# Altium PCB BT Mesh.PcbDoc
Units mil, origin at the board's own origin, x right, y up, seen from the top; angles counter-clockwise.
Board outline 3505 x 3005 mil, 2 copper layers (Top Layer, Bottom Layer); 90 components, 63 nets, 298 pads, 99 vias.
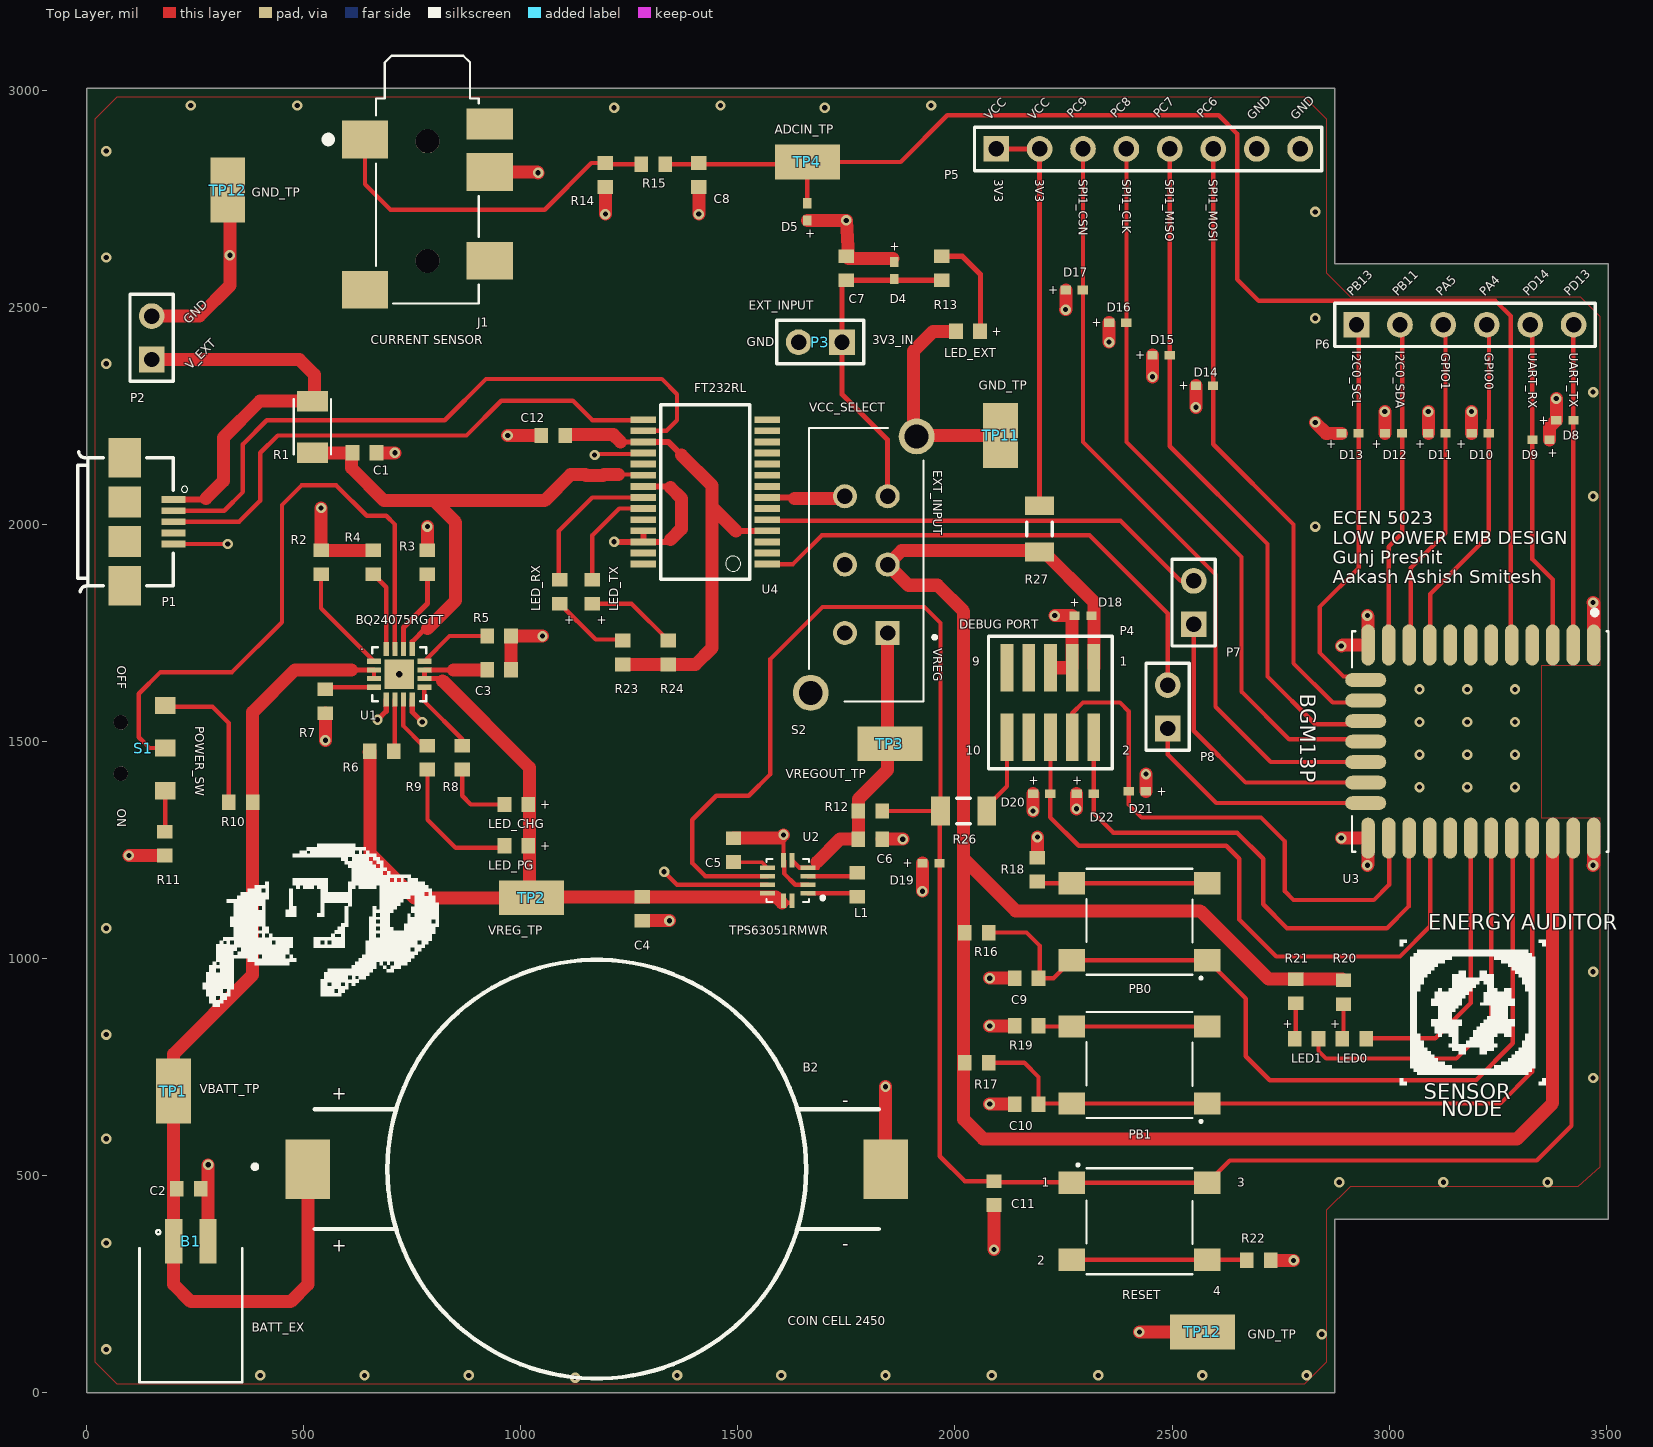
[diagram p0: Top Layer view]
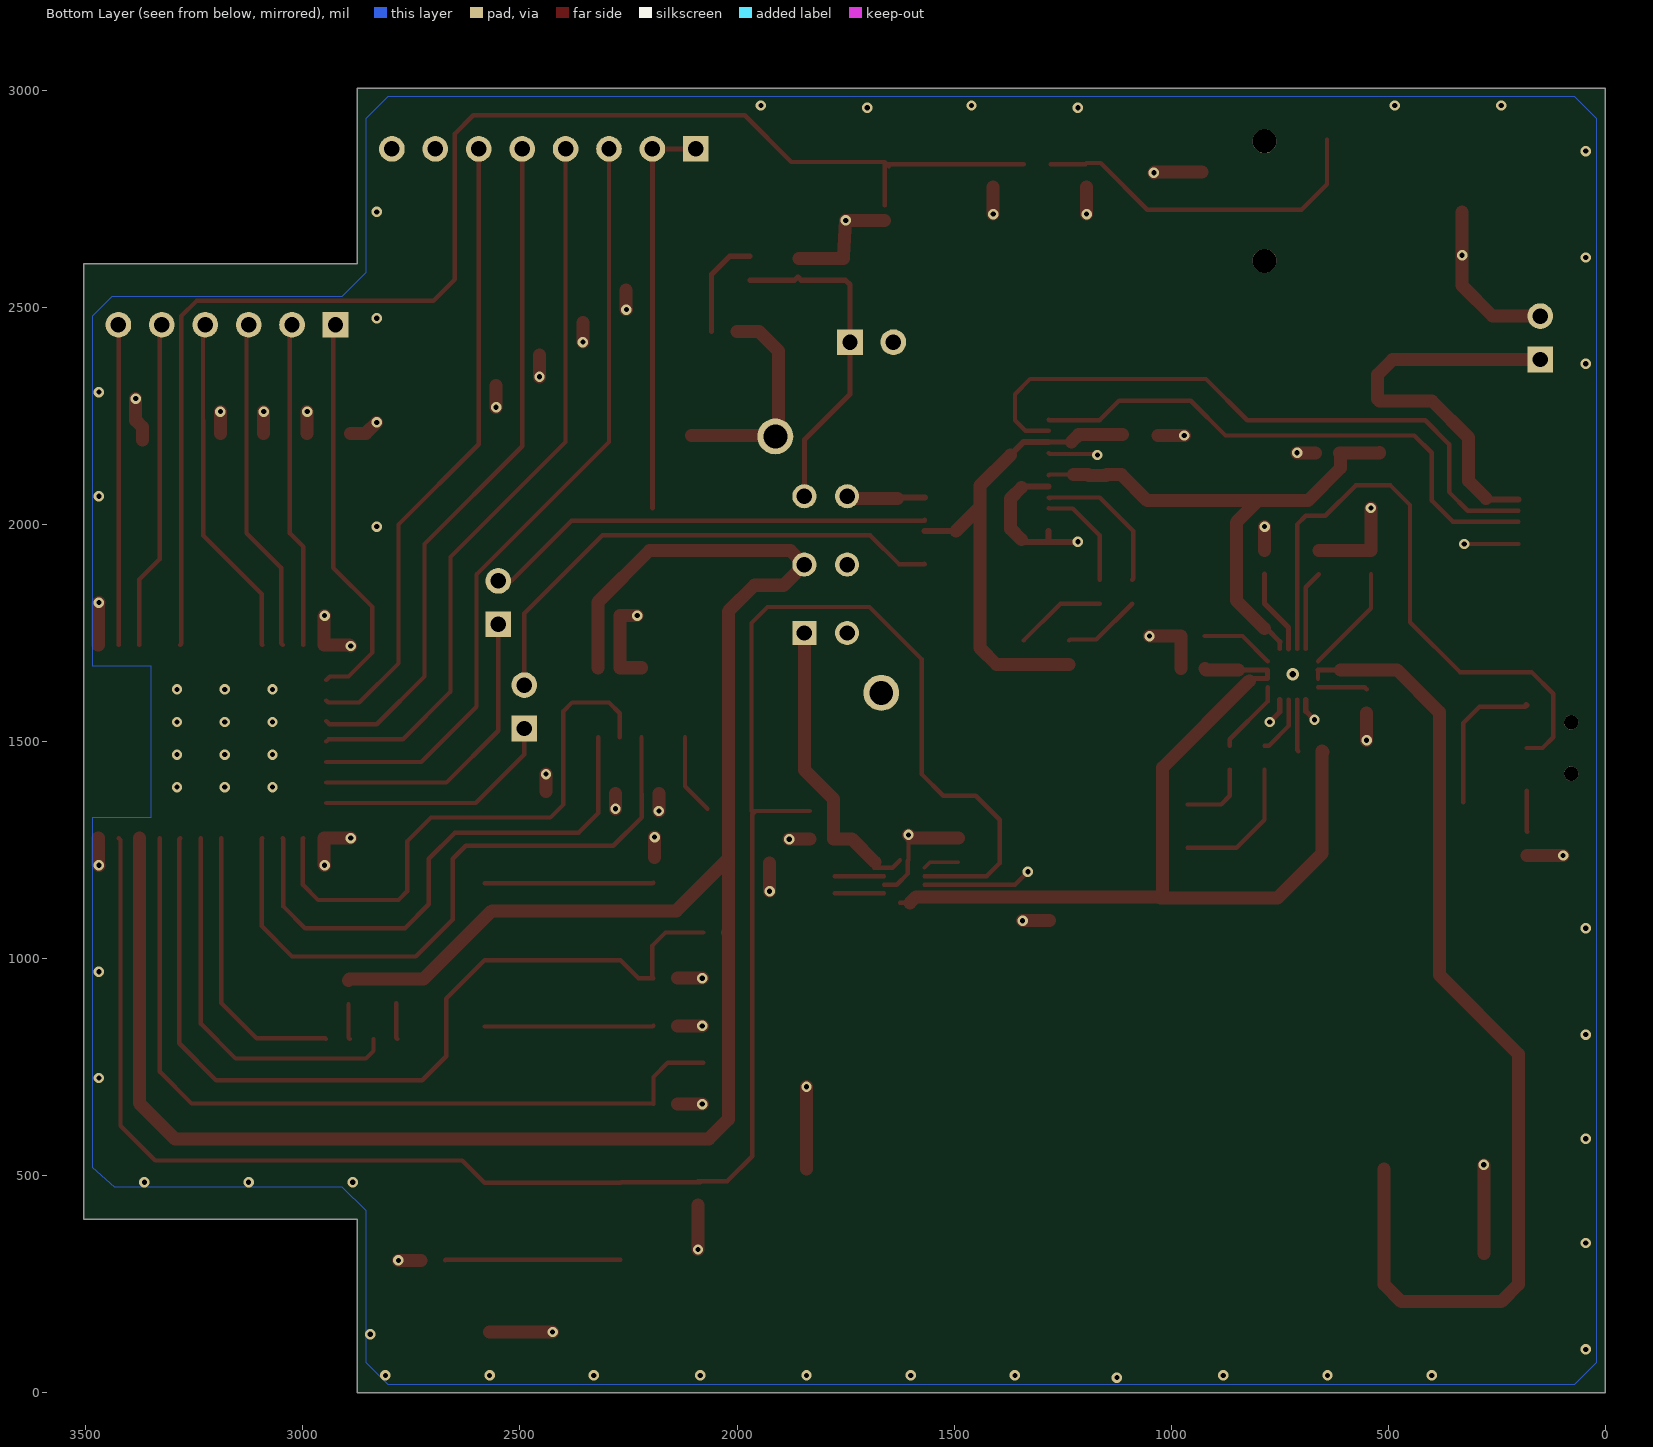
[diagram p1: Bottom Layer view, seen from below]

## Layer stack, top to bottom
Top Solder: solder mask 0.4, Solder Resist, Dk 3.5
Top Layer: signal copper 1.4
Dielectric 1: dielectric 12.6, FR-4, Dk 4.8
Bottom Layer: signal copper 1.4
Bottom Solder: solder mask 0.4, Solder Resist, Dk 3.5

## Board outline
2875,2600 3505,2600 3505,400 2875,400 2875,0 0,0 0,3005 2875,3005

## Design rules (kind name [scope] priority, off if disabled: settings)
Clearance [All] p1: gap=10 ignorepadtopadclearanceinfootprint=TRUE except(0: Arc-Hole Track-Hole SMDPad-Hole THPad-Hole Via-Hole Fill-Hole Poly-Hole Region-Hole Text-Hole; 8: Arc-SMDPad Track-Track Track-SMDPad SMDPad-SMDPad; 20: Arc-Via Track-Via SMDPad-Via THPad-Via Via-Via; 25: Arc-Poly Track-Poly SMDPad-Poly THPad-Poly Via-Poly Fill-Poly Poly-Poly)
PolygonConnect [All] p1: connectstyle=Relief reliefconductorwidth=10 reliefentries=4 polygonreliefangle="90 Angle" airgapwidth=10
RoutingVias [All] p1: holewidth=12 width=24 viastyle="Through Hole" minholewidth=10 minwidth=20 maxholewidth=14 maxwidth=28
SolderMaskExpansion [All] p1: expansion=4
Width Width_Power [(InNet('V_USB') OR InNet('V_RAW') OR InNet('V_BATT') OR InNet('VREGOUT') OR InNet('VREG') OR InNet('VCC_IO') OR InNet('VCC') OR InNet('GND'))] p1: maxlimit=30 minlimit=10 preferedwidth=20
Width [All] p2: maxlimit=12 minlimit=8 preferedwidth=10
30 further rules are at their usual default settings.

## Classes and differential pairs
component class USB: C12 LED_RX LED_TX R23 R24 U4
component class Regulator: C4 C5 C6 C7 D4 L1 LED_EXT P3 R12 R13 S2 TP3 TP12 U2
component class PMIC: B1 B2 C1 C2 C3 LED_CHG LED_PG P1 P2 R1 R2 R3 R4 R5 R6 R7 R8 R9 R10 R11 S1 TP1 TP2 U1
component class Gecko: C8 D5 J1 P7 P8 R14 R15 TP4 TP11 TP12 U3
component class "Gecko IO": C9 C10 C11 D8 D9 D10 D11 D12 D13 D14 D15 D16 D17 D18 D19 D20 D21 D22 LED0 LED1 P4 P5 P6 PB0 PB1 R16 R17 R18 R19 R20 R21 R22 R26 R27 RESET

## Components (designator, comment, footprint, x,y, rotation, side; value= is the part's Value field where it differs from the comment)
B1 "BATT_EX" S2B-PH-SM4-TB(LF)(SN) 240,270 r90 top
B2 "SMTU2450N-LF_BULK" SMTU2430-LF 1175,515 r0 top
C1 "1uF" 1608[0603] 640,2165 r180 top
C2 "10uF" 1608[0603] 235,470 r180 top
C3 "1uF" 1608[0603] 950,1665 r180 top
C4 "10uF" 1608[0603] 1280,1115 r90 top
C5 "1.3nF" 1608[0603] 1490,1250 r270 top
C6 "10uF" 1608[0603] 1805,1275 r180 top
C7 "1uF" 1608[0603] 1750,2590 r270 top
C8 "1uF" 1608[0603] 1410,2805 r90 top
C9 "1nF" 1608[0603] 2165,955 r0 top
C10 "1nF" 1608[0603] 2165,665 r0 top
C11 "100nF" 1608[0603] 2090,460 r270 top
C12 "100nF" 1608[0603] 1075,2205 r180 top
D4 "D Zener" 0402 1860,2585 r270 top
D5 "D Zener" 0402 1660,2720 r90 top
D8 "D Zener" 0402 3405,2240 r0 top
D9 "D Zener" 0402 3350,2195 r180 top
D10 "D Zener" 0402 3210,2210 r0 top
D11 "D Zener" 0402 3110,2210 r0 top
D12 "D Zener" 0402 3010,2210 r0 top
D13 "D Zener" 0402 2910,2210 r0 top
D14 "D Zener" 0402 2575,2320 r0 top
D15 "D Zener" 0402 2475,2390 r0 top
D16 "D Zener" 0402 2375,2465 r0 top
D17 "D Zener" 0402 2275,2540 r0 top
D18 "D Zener" 0402 2295,1790 r0 top
D19 "D Zener" 0402 1945,1220 r0 top
D20 "D Zener" 0402 2200,1380 r0 top
D21 "D Zener" 0402 2420,1385 r180 top
D22 "D Zener" 0402 2300,1380 r0 top
J1 "SJ2-35043C-SMT-TR" CUI_SJ2-35043C-SMT-TR 785,2745 r270 top
L1 "1.5uH" 1608[0603] 1775,1170 r270 top
LED0 "LED0" 1608[0603] 2920,815 r0 top (schematic designator D6)
LED1 "LED1" 1608[0603] 2810,815 r0 top (schematic designator D7)
LED_CHG "LED_CHG" 1608[0603] 990,1355 r180 top (schematic designator D1)
LED_EXT "LED_EXT" 1608[0603] 2030,2445 r180 top (schematic designator D3)
LED_PG "LED_PG" 1608[0603] 990,1260 r180 top (schematic designator D2)
LED_RX "LED_RX" 1608[0603] 1090,1845 r90 top (schematic designator D23)
LED_TX "LED_TX" 1608[0603] 1165,1845 r90 top (schematic designator D24)
P1 "10104111-0001LF" FRAMATOME_10104111-0001LF 87.8,2006.18 r270 top
P2 "Header 2" HDR1X2 150,2380 r90 top
P3 "EXT_INPUT" HDR1X2 1740,2420 r180 top
P4 "SAMTEC-FTSH-105-01-X-DV" SAMTEC-FTSH-105-01-X-DV 2220,1590 r180 top
P5 "Header 8" HDR1X8 2095,2865 r0 top
P6 "Header 6" HDR1X6 2925,2460 r0 top
P7 "Header 2" HDR1X2 2550,1770 r90 top
P8 "Header 2" HDR1X2 2490,1530 r90 top
PB0 "PB0" 430182043816 2425,1085 r180 top (schematic designator S3)
PB1 "PB1" 430182043816 2425,755 r180 top (schematic designator S4)
R1 "PTC FUSE" RESC3216X125N 520,2225 r270 top
R2 "10K" 1608[0603] 540,1913 r270 top
R3 "0R" 1608[0603] 785,1913 r270 top
R4 "8.9K" 1608[0603] 660,1913 r270 top
R5 "3.3K" 1608[0603] 950,1743 r180 top
R6 "10K" 1608[0603] 680,1478 r0 top
R7 "100K" 1608[0603] 550,1593 r270 top
R8 "1K" 1608[0603] 865,1463 r270 top
R9 "3.3K" 1608[0603] 785,1463 r270 top
R10 "100K" 1608[0603] 355,1360 r180 top
R11 "0R" 1608[0603] 180,1265 r90 top
R12 "100K" 1608[0603] 1805,1340 r180 top
R13 "3.3K" 1608[0603] 1970,2590 r270 top
R14 "330" 1608[0603] 1195,2805 r90 top value=330R
R15 "1.6K" 1608[0603] 1305,2830 r180 top
R16 "1M" 1608[0603] 2050,1060 r180 top
R17 "1M" 1608[0603] 2050,760 r180 top
R18 "100R" 1608[0603] 2190,1205 r270 top
R19 "100R" 1608[0603] 2165,845 r0 top
R20 "3.3K" 1608[0603] 2895,922.44 r90 top
R21 "3.3K" 1608[0603] 2785,925 r90 top
R22 "100R" 1608[0603] 2700,305 r180 top
R23 "1K" 1608[0603] 1235,1705 r270 top
R24 "1K" 1608[0603] 1340,1705 r270 top
R26 "0R" C1206 2020,1340 r180 top
R27 "0R" C1206 2195,1990 r270 top
RESET "RESET" 430182043816 2425,395 r0 top (schematic designator S5)
S1 "POWER_SW" SW_AYZ0102AGRLC 130,1485 r270 top
S2 "1825289-1" SW_1825289-1_1825289-1(Primary) 1795.79,1907.52 r90 top
TP1 "VBATT_TP" TP380X203 200,695 r90 top
TP2 "VREG_TP" TP380X203 1025,1140 r0 top
TP3 "VREGOUT_TP" TP380X203 1850,1495 r0 top
TP4 "ADCIN_TP" TP380X203 1660,2835 r0 top
TP11 "GND_TP" TP380X203 2105,2205 r270 top
TP12 "GND_TP" TP380X203 325,2770 r270 top
TP12 "GND_TP" TP380X203 2570,140 r180 top (schematic designator TP10)
U1 "BQ24075RGTT" QFN50P300X300X100-17N 720,1655 r0 top
U2 "TPS63051RMWR" QFN50P250X250X100-12N 1615,1180 r180 top
U3 "BGM13P22F512GA-V2" MODULE_BGM13P22F512GA-V2 3210,1500 r270 top
U4 "FT232RL" SOP65P780X200-28N 1425,2075 r180 top

## Footprints (in the part's own frame and the unit in brackets; to place one, negate y for a bottom-side part, rotate by r counter-clockwise, add the part's x,y. Pads: shape width x height; smd on the part's side, far side on the other; paste and mask are expansions set on the pad)
0402 [mm] "Chip Capacitor, Body 1.0x0.5mm, IPC High Density"
  rect 0.6x0.5 smd: 1(-0.5,0) 2(0.5,0)
  body extent -0.55,-0.3 0.55,0.3, height 1.3
1608[0603] [mm] "Chip Capacitor, Body 1.6x0.8mm, IPC High Density"
  rect 0.8x0.9 smd: 1(-0.7,0) 2(0.7,0)
  body extent -0.87,-0.48 0.87,0.48, height 1.3
430182043816 [mm]
  rect 1.55x1.3 smd: 1(-3.975,2.25) 2(-3.975,-2.25) 3(3.975,2.25) 4(3.975,-2.25)
  silkscreen extent -3.65,-3.1 3.1,3.35
C1206 [mm] "Chip Capacitor, Body 3.2x1.6mm, IPC High Density"
  rect 1.1x1.7 smd: 1(-1.35,0) 2(1.35,0)
  silkscreen extent -0.4,-0.75 0.4,0.75, body extent -1.7,-0.9 1.7,0.9, height 1.3
CUI_SJ2-35043C-SMT-TR [mm]
  rect 2.2x2.7 smd: 1(-3.6,-3.65) 2(5.2,-3.65) 3(-1.7,3.65) 4(3.5,3.65)
  rect 1.8x2.7 smd: 11(-4.5,3.65)
  round 1.4 hole 1.4 unplated: None(-3.5,0) None(3.5,0)
  silkscreen extent -8.5,-6 6,3
FRAMATOME_10104111-0001LF [mm]
  rect 0.4x1.4 smd: 1(-1.3,2.85) 2(-0.65,2.85) 3(0,2.85) 4(0.65,2.85) 5(1.3,2.85)
  rect 2.3x1.9 smd: 6(-3.75,0) 9(3.75,0)
  rect 1.8x1.9 smd: 7(-1.15,0) 8(1.15,0)
  silkscreen extent -4.1,-2.75 4.1,3.68
HDR1X2 [mm] "Connector; Header; 2 Position"
  rect 1.5x1.5 hole 0.9: 1(0,0)
  round 1.5 hole 0.9: 2(2.54,0)
  silkscreen extent -1.27,-1.27 3.81,1.27
HDR1X6 [mm] "Connector; Header; 6 Position"
  rect 1.5x1.5 hole 0.9: 1(0,0)
  round 1.5 hole 0.9: 2(2.54,0) 3(5.08,0) 4(7.62,0) 5(10.16,0) 6(12.7,0)
  silkscreen extent -1.27,-1.27 13.97,1.27
HDR1X8 [mm] "Connector; Header; 8 Position"
  rect 1.5x1.5 hole 0.9: 1(0,0)
  round 1.5 hole 0.9: 2(2.54,0) 3(5.08,0) 4(7.62,0) 5(10.16,0) 6(12.7,0) 7(15.24,0) 8(17.78,0)
  silkscreen extent -1.27,-1.27 19.05,1.27
MODULE_BGM13P22F512GA-V2 [mm]
  oval 2.4x0.8 smd: 1(-5.65,6.64) 2(-5.65,5.44) 3(-5.65,4.24) 4(-5.65,3.04) 5(-5.65,1.84) 6(-5.65,0.64) 7(-5.65,-0.56) 8(-5.65,-1.76) 9(-5.65,-2.96) 10(-5.65,-4.16) 11(-5.65,-5.36) 12(-5.65,-6.56) 20(5.65,-6.56) 21(5.65,-5.36) 22(5.65,-4.16) 23(5.65,-2.96) 24(5.65,-1.76) 25(5.65,-0.56) 26(5.65,0.64) 27(5.65,1.84) 28(5.65,3.04) 29(5.65,4.24) 30(5.65,5.44) 31(5.65,6.64)
  oval 0.8x2.4 smd: 13(-3.6,-6.7) 14(-2.4,-6.7) 15(-1.2,-6.7) 16(0,-6.7) 17(1.2,-6.7) 18(2.4,-6.7) 19(3.6,-6.7)
  silkscreen extent -7.69,-7.5 6.45,7.5
QFN50P250X250X100-12N [mm]
  rect 0.86x0.27 smd: 1(-1.185,0.75) 2(-1.185,0.25) 3(-1.185,-0.25) 4(-1.185,-0.75) 7(1.185,-0.75) 8(1.185,-0.25) 9(1.185,0.25) 10(1.185,0.75)
  rect 0.27x0.86 smd: 5(-0.25,-1.185) 6(0.25,-1.185) 11(0.25,1.185) 12(-0.25,1.185)
  silkscreen extent -2.14,-1.25 1.25,1.25
QFN50P300X300X100-17N [mil]
  rect 32x12 smd: 1(-58,30) 2(-58,10) 3(-58,-10) 4(-58,-30) 9(58,-30) 10(58,-10) 11(58,10) 12(58,30)
  rect 12x32 smd: 5(-30,-58) 6(-10,-58) 7(10,-58) 8(30,-58) 13(30,58) 14(10,58) 15(-10,58) 16(-30,58)
  rect 67x67 smd: 17(0,0)
  silkscreen extent -62,-62 62,62
RESC3216X125N [mm]
  rect 1.2x1.82 smd: 1(-1.505,0) 2(1.505,0)
  silkscreen extent -1.63,-1.09 1.63,1.09
S2B-PH-SM4-TB(LF)(SN) [mm]
  rect 2.6x1 smd: 1(2,1) 2(2,-1)
  silkscreen extent -6.25,-3 2.67,3
SAMTEC-FTSH-105-01-X-DV [mm]
  rect 0.74x2.79 smd: 1(-2.54,-2.032) 2(-2.54,2.032) 3(-1.27,-2.032) 4(-1.27,2.032) 5(0,-2.032) 6(0,2.032) 7(1.27,-2.032) 8(1.27,2.032) 9(2.54,-2.032) 10(2.54,2.032)
  silkscreen extent -3.63,-3.88 3.63,3.88
SMTU2430-LF [mm]
  rect 2.6x3.5 smd: 1(-16.9,0) 2(16.9,0)
  silkscreen extent -20.12,-12.25 16.5,12.25
SOP65P780X200-28N [mm]
  rect 1.5x0.4 smd: 1(-3.625,4.225) 2(-3.625,3.575) 3(-3.625,2.925) 4(-3.625,2.275) 5(-3.625,1.625) 6(-3.625,0.975) 7(-3.625,0.325) 8(-3.625,-0.325) 9(-3.625,-0.975) 10(-3.625,-1.625) 11(-3.625,-2.275) 12(-3.625,-2.925) 13(-3.625,-3.575) 14(-3.625,-4.225) 15(3.625,-4.225) 16(3.625,-3.575) 17(3.625,-2.925) 18(3.625,-2.275) 19(3.625,-1.625) 20(3.625,-0.975) 21(3.625,-0.325) 22(3.625,0.325) 23(3.625,0.975) 24(3.625,1.625) 25(3.625,2.275) 26(3.625,2.925) 27(3.625,3.575) 28(3.625,4.225)
  silkscreen extent -2.6,-5.1 2.6,5.1
SW_1825289-1_1825289-1(Primary) [mm]
  rect 1.408x1.408 hole 0.9: 1(-4,-1.25)
  round 1.408 hole 0.9: 2(0,-1.25) 3(4,-1.25) 4(-4,1.25) 5(0,1.25) 6(4,1.25)
  round 2.1 hole 1.4: S1(-7.5,3.25) S2(7.5,-2.95)
  silkscreen extent -8,-4.1 8,3.35
SW_AYZ0102AGRLC [mm]
  rect 1x1.2 smd: 1(-2.5,1.3) 2(0,1.3) 3(2.5,1.3)
  round 0.85 hole 0.85 unplated: None(-1.5,-1.3) None(1.5,-1.3)
TP380X203 [mm]
  rect 3.8x2.03 smd: 1(0,0)

## Part data
B1: library part S2B-PH-SM4-TB(LF)(SN), "PH Series 2 Position 2 mm Pitch Surface Mount Side Entry Shrouded Header", Digi-Key Part Number=455-1749-1-ND, Manufacturer="JST Sales America Inc.", ComponentLink1Description="Digi-Key Link", ComponentLInk1URL=https://www.digikey.com/products/en/connectors-interconnects/rectangular-connectors-headers-male-pins/314?k=S2B-PH-SM4-TB&k=&pkeyword=S2B-PH-SM4-TB&pv7=2&sf=0&quantity=&ColumnSort=0&page=1&pageSize=25, Manufacturer Part Number=S2B-PH-SM4-TB(LF)(SN)
B2: "Coin Cell Battery Holders SFC MNT FOR CR2450N", Manufacturer=RENATA, Manufacturer Part Number="SMTU2450N-LF BULK", Mouser Part Number=614-SMTU2450N-LF, ComponentLink1Description="Mouser Link", ComponentLInk1URL=https://www.mouser.com/ProductDetail/Renata/SMTU2450N-LF-BULK?qs=LsPilcdHE7Gn4SDnejz9jQ%3D%3D
C1 C3 C7 C8: library part Cap, "CAP CER 1UF 16V X7R 0603", Digi-Key Part Number=1276-6524-1-ND, Manufacturer="Samsung Electro-Mechanics", Manufacturer Part Number=CL10B105MO8NNWC, ComponentLink1Description="Digi-Key Link", ComponentLInk1URL=https://www.digikey.com/product-detail/en/samsung-electro-mechanics/CL10B105MO8NNWC/1276-6524-1-ND/5961383
C2: library part "Cap Semi", "CAP CER 10UF 10V X5R 0603", Digi-Key Part Number=490-10474-1-ND, Manufacturer="Murata Electronics North America", Manufacturer Part Number=GRM188R61A106KE69D, ComponentLink1Description="Digi-Key Link", ComponentLInk1URL=https://www.digikey.com/products/en?keywords=490-10474-1-ND
C4 C6: library part Cap, "CAP CER 10UF 10V X5R 0603", Digi-Key Part Number=490-10474-1-ND, Manufacturer="Murata Electronics North America", Manufacturer Part Number=GRM188R61A106KE69D, ComponentLink1Description="Digi-Key Link", ComponentLInk1URL=https://www.digikey.com/products/en?keywords=490-10474-1-ND
C5: library part Cap, "CAP CER 1300PF 25V C0G/NP0 0603", Digi-Key Part Number=399-14953-1-ND, Manufacturer=KEMET, Manufacturer Part Number=C0603C132J3GAC7867, ComponentLink1Description="Digi-Key Link", ComponentLInk1URL=https://www.digikey.com/product-detail/en/kemet/C0603C132J3GAC7867/399-14953-1-ND/7382502
C9 C10: library part Cap, "CAP CER 1000PF 50V X7R 0603", Digi-Key Part Number=478-5006-1-ND, Manufacturer="AVX Corporation", Manufacturer Part Number=06035C102JAT2A, ComponentLink1Description="Digi-Key Link", ComponentLInk1URL=https://www.digikey.com/product-detail/en/avx-corporation/06035C102JAT2A/478-5006-1-ND/1888217
C11 C12: library part Cap, "CAP CER 0.1UF 16V X7R 0603", Digi-Key Part Number=478-7617-1-ND, Manufacturer="AVX Corporation", Manufacturer Part Number=0603YC104MAT4A, ComponentLink1Description="Digi-Key Link", ComponentLInk1URL=https://www.digikey.com/products/en/capacitors/ceramic-capacitors/60?k=capacitor&k=&pkeyword=capacitor&pv2049=u0.1%C2%B5F&sf=0&FV=c0005%2C1c0002%2C380009%2C400005%2C1f140000%2Cffe0003c&quantity=&ColumnSort=0&page=1&stock=1&pageSize=25
D4 D8 D9 D10 D11 D12 D13 D14 D15 D16 D17 D18 D19 D20 D21 D22: "TVS DIODE 5.5V 14V 2X1SON", Digi-Key Part Number=296-30406-1-ND, Manufacturer="Texas Instruments", Manufacturer Part Number=TPD1E10B06DPYR, ComponentLink1Description="Digi-Key Link", ComponentLInk1URL=https://www.digikey.com/product-detail/en/texas-instruments/TPD1E10B06DPYR/296-30406-1-ND/3283560
D5: "Zener Diode", Digi-Key Part Number=296-30406-1-ND, Manufacturer="Texas Instruments", Manufacturer Part Number=TPD1E10B06DPYR, ComponentLink1Description="Digi-Key Link", ComponentLInk1URL=https://www.digikey.com/product-detail/en/texas-instruments/TPD1E10B06DPYR/296-30406-1-ND/3283560
J1: "AUDIO JACK, 3.5 MM, RT, 4 CONDUC", Digi-Key Part Number=CP-SJ2-35043C-SMT-CT-ND, Manufacturer="CUI Inc.", ComponentLink1Description="Digi-Key Link", ComponentLInk1URL=https://www.digikey.com/products/en/connectors-interconnects/barrel-audio-connectors/434?k=SJ2-35043C-SMT-TR&k=&pkeyword=SJ2-35043C-SMT-TR&pv7=2&sf=0&quantity=&ColumnSort=0&page=1&pageSize=25, Manufacturer Part Number=SJ2-35043C-SMT-TR
L1: library part Inductor, "FIXED IND 1.5UH 1.1A 213 MOHM", Digi-Key Part Number=490-15637-1-ND, Manufacturer="Murata Electronics North America", Manufacturer Part Number=LQM18PN1R5MFHD, ComponentLink1Description="Digi-Key Link", ComponentLInk1URL=https://www.digikey.com/product-detail/en/murata-electronics-north-america/LQM18PN1R5MFHD/490-15637-1-ND/6800302
LED0 LED1 LED_EXT LED_PG: library part LED2, "LED GREEN DIFFUSED 0603 SMD", Digi-Key Part Number=475-3118-1-ND, Manufacturer="OSRAM Opto Semiconductors Inc.", Manufacturer Part Number="LG L29K-F2J1-24-Z", ComponentLink1Description="Digi-Key Link", ComponentLInk1URL=https://www.digikey.com/product-detail/en/osram-opto-semiconductors-inc/LG-L29K-F2J1-24-Z/475-3118-1-ND/4899549
LED_CHG: library part LED2, "Blue 470nm LED Indication - Discrete 2.85V 0603 (1608 Metric)", Digi-Key Part Number=475-2816-1-ND, Manufacturer="OSRAM Opto Semiconductors Inc.", Manufacturer Part Number="LB Q39G-L2OO-35-1", ComponentLink1Description="Digi-Key Link", ComponentLInk1URL=https://www.digikey.com/product-detail/en/osram-opto-semiconductors-inc/LB-Q39G-L2OO-35-1/475-2816-1-ND/2176355
LED_RX: library part LED2, "LED RED DIFFUSED 0603 SMD", Digi-Key Part Number=475-1195-1-ND, Manufacturer="OSRAM Opto Semiconductors Inc.", Manufacturer Part Number="LS L29K-H1J2-1-Z", ComponentLink1Description="Digi-Key Link", ComponentLInk1URL=https://www.digikey.com/product-detail/en/osram-opto-semiconductors-inc/LG-L29K-F2J1-24-Z/475-3118-1-ND/4899549
LED_TX: library part LED2, "LED YELLOW DIFFUSED 0603 SMD", Digi-Key Part Number=475-1196-1-ND, Manufacturer="OSRAM Opto Semiconductors Inc.", Manufacturer Part Number="LY L29K-H1K2-26-Z", ComponentLink1Description="Digi-Key Link", ComponentLInk1URL=https://www.digikey.com/product-detail/en/osram-opto-semiconductors-inc/LY-L29K-H1K2-26-Z/475-1196-1-ND/810357
P1: "Micro Usb, 2.0 Type Ab, Receptacle, Th", Digi-Key Part Number=609-4053-1-ND, Manufacturer="Amphenol FCI", ComponentLink1Description="Digi-Key Link", ComponentLInk1URL=https://www.digikey.com/product-detail/en/amphenol-fci/10104111-0001LF/609-4053-1-ND/2350359?utm_source=snapeda&utm_medium=aggregator&utm_campaign=symbol, Manufacturer Part Number=10104111-0001LF
P2 P7 P8: "Header, 2-Pin"
  P7 P8: LatestRevisionDate=17-Jul-2002, LatestRevisionNote="Re-released for DXP Platform.", Publisher="Altium Limited"
P3: library part "Header 2", "Header, 2-Pin"
P4: ".050\" X .050 TERMINAL STRIP", Digi-Key Part Number=SAM13160CT-ND, Manufacturer=Samtec, Manufacturer Part Number=FTSH-105-01-F-DV-K-TR, ComponentLink1Description="Digi-Key Link", ComponentLInk1URL=https://www.digikey.com/products/en/connectors-interconnects/rectangular-connectors-headers-male-pins/314?k=FTSH-105-01-F-DV-K-TR&k=&pkeyword=FTSH-105-01-F-DV-K-TR&pv7=2&sf=0&quantity=&ColumnSort=0&page=1&pageSize=25
P5: "Header, 8-Pin", LatestRevisionDate=17-Jul-2002, LatestRevisionNote="Re-released for DXP Platform.", Publisher="Altium Limited"
P6: "Header, 6-Pin", LatestRevisionDate=17-Jul-2002, LatestRevisionNote="Re-released for DXP Platform.", Publisher="Altium Limited"
PB0 PB1 RESET: library part 430182043816, "SWITCH TACTILE SPST-NO 0.05A 12V", Digi-Key Part Number=732-7004-1-ND, Manufacturer="Wurth Electronics", ComponentLink1Description="Digi-Key Link", ComponentLInk1URL=https://www.digikey.com/products/en/switches/tactile-switches/197?k=430+182+043+816&k=&pkeyword=430+182+043+816&pv7=2&sf=0&quantity=&ColumnSort=0&page=1&pageSize=25, Manufacturer Part Number=430182043816
R1: library part 0ZCA0075FF2G, "PTC RESET FUSE 6V 500MA 1206", Digi-Key Part Number=F2112CT-ND, Manufacturer="Bel Fuse", Manufacturer Part Number="Littelfuse Inc.", ComponentLink1Description="Digi-Key Link", ComponentLInk1URL=https://www.digikey.com/product-detail/en/littelfuse-inc/1206L050YR/F2112CT-ND/455721
R2 R6: library part Res3, "RES SMD 10K OHM 1% 1/8W 0603", Digi-Key Part Number=MCT0603-10.0K-CFCT-ND, Manufacturer="Vishay Beyschlag", Manufacturer Part Number=MCT06030C1002FP500, ComponentLink1Description="Digi-Key Link", ComponentLInk1URL=https://www.digikey.com/products/en?keywords=MCT0603-10.0K-CFCT-ND
R3 R11: library part Res3, "RES 0 OHM JUMPER 1/8W 0603", Digi-Key Part Number=749-1745-1-ND, Manufacturer="Vishay Beyschlag", Manufacturer Part Number=MCT0603MZ0000ZP500, ComponentLink1Description="Digi-Key Link", ComponentLInk1URL=https://www.digikey.com/product-detail/en/vishay-beyschlag/MCT0603MZ0000ZP500/749-1745-1-ND/7348053
R4: library part Res3, "RES SMD 8.87KOHM 0.5% 1/10W 0603", Digi-Key Part Number=311-8.87KDCT-ND, Manufacturer=Yageo, Manufacturer Part Number=RT0603DRD078K87L, ComponentLink1Description="Digi-Key Link", ComponentLInk1URL=https://www.digikey.com/product-detail/en/yageo/RT0603DRD078K87L/311-8.87KDCT-ND/1035893
R5 R9 R13 R20 R21: library part Res3, "RES SMD 3.3K OHM 5% 1/10W 0603", Digi-Key Part Number=P3.3KGCT-ND, Manufacturer="Panasonic Electronic Components", Manufacturer Part Number=ERJ-3GEYJ332V, ComponentLink1Description="Digi-Key Link", ComponentLInk1URL=https://www.digikey.com/product-detail/en/panasonic-electronic-components/ERJ-3GEYJ332V/P3.3KGCT-ND/135146
R7 R10 R12: library part Res3, "RES SMD 100K OHM 0.1% 1/10W 0603", Digi-Key Part Number=RG16P100KBCT-ND, Manufacturer=Susumu, Manufacturer Part Number=RG1608P-104-B-T5, ComponentLink1Description="Digi-Key Link", ComponentLInk1URL=https://www.digikey.com/products/en/resistors/chip-resistor-surface-mount/52?k=RG1608P-104-B-T5&k=&pkeyword=RG1608P-104-B-T5&pv7=2&sf=0&quantity=&ColumnSort=0&page=1&pageSize=25
R8 R23 R24: library part Res3, "RES SMD 1K OHM 0.1% 1/10W 0603", Digi-Key Part Number=YAG1237CT-ND, Manufacturer=Yageo, Manufacturer Part Number=RT0603BRD071KL, ComponentLink1Description="Digi-Key Link", ComponentLInk1URL=https://www.digikey.com/product-detail/en/yageo/RT0603BRD071KL/YAG1237CT-ND/4340590
R14: library part Res3, "RES SMD 330 OHM 5% 1/10W 0603", Digi-Key Part Number=541-4060-1-ND, Manufacturer="Vishay Dale", Manufacturer Part Number=CRCW0603330RJNEAC, ComponentLink1Description="Digi-Key Link", ComponentLInk1URL=https://www.digikey.com/product-detail/en/vishay-dale/CRCW0603330RJNEAC/541-4060-1-ND/7928743
R15: library part Res3, "RES SMD 1.6K OHM 5% 1/10W 0603", Digi-Key Part Number=311-1.6KGRCT-ND, Manufacturer=Yageo, Manufacturer Part Number=RC0603JR-071K6L, ComponentLink1Description="Digi-Key Link", ComponentLInk1URL=https://www.digikey.com/product-detail/en/yageo/RC0603JR-071K6L/311-1.6KGRCT-ND/729639
R16 R17: library part Res3, "RES SMD 1M OHM 5% 1/10W 0603", Digi-Key Part Number=1276-5134-1-ND, Manufacturer="Samsung Electro-Mechanics", Manufacturer Part Number=RC1608J105CS, ComponentLink1Description="Digi-Key Link", ComponentLInk1URL=https://www.digikey.com/product-detail/en/samsung-electro-mechanics/RC1608J105CS/1276-5134-1-ND/3968106
R18 R19 R22: library part Res3, "RES SMD 100 OHM 5% 1/10W 0603", Digi-Key Part Number=541-4059-1-ND, Manufacturer="Vishay Dale", Manufacturer Part Number=CRCW0603100RJNEAC, ComponentLink1Description="Digi-Key Link", ComponentLInk1URL=https://www.digikey.com/product-detail/en/vishay-dale/CRCW0603100RJNEAC/541-4059-1-ND/7928742
R26 R27: library part Res1, "Resistor", LatestRevisionDate=17-Jul-2002, LatestRevisionNote="Re-released for DXP Platform.", PackageDescription="Axial Device, Thru-Hole; 2 Leads; 0.3 in Pin Spacing", PackageReference=AXIAL-0.3, Published=8-Jun-2000, Publisher="Altium Limited"
S1: library part AYZ0102AGRLC, "SWITCH SLIDE SPDT 100MA 12V", Digi-Key Part Number=401-2012-1-ND, Manufacturer=C&K, ComponentLink1Description="Digi-Key Link", ComponentLInk1URL=https://www.digikey.com/products/en/switches/slide-switches/213?k=AYZ0102AGRLC&k=&pkeyword=AYZ0102AGRLC&pv7=2&sf=0&quantity=&ColumnSort=0&page=1&pageSize=25, Manufacturer Part Number=AYZ0102AGRLC
S2: "MHS22204=DPDT SL SW VERT AG", Digi-Key Part Number=450-1572-ND, Manufacturer="TE Connectivity", ComponentLink1Description="Digi-Key Link", ComponentLInk1URL=https://www.digikey.com/products/en?keywords=MHS22204, Manufacturer Part Number=1825289-1
TP1 TP2 TP3 TP4 TP11 TP12 TP12: library part 5019, "Phosphor Bronze Contact Miniature Silver Plated Surface Mount Test Points", Digi-Key Part Number=36-5019CT-ND, Manufacturer=Keystone, ComponentLink1Description="Digi-Key Link", ComponentLInk1URL=https://www.digikey.com/product-detail/en/keystone-electronics/5019/36-5019CT-ND/3907344?utm_source=snapeda&utm_medium=aggregator&utm_campaign=symbol, Manufacturer Part Number=5019
U1: "USB-Friendly Li-Ion Battery Charger and Power-Path Management IC, Vout 5.5V 16-QFN -40 to 85", Package="QFN-16 Texas Instruments", Availability=Unavailable, MF="Texas Instruments", MP=BQ24075RGTT, Price=None, SnapEDA_Link=https://www.snapeda.com/parts/BQ24075RGTT/Texas%20Instruments/view-part/?ref=snap
U2: "Tiny Single Inductor Buck Boost Converter 12-VQFN -40 to 85", Digi-Key Part Number=296-42650-1-ND, Manufacturer="Texas Instruments", ComponentLink1Description="Digi-Key Link", ComponentLInk1URL=https://www.digikey.com/products/en/integrated-circuits-ics/pmic-voltage-regulators-dc-dc-switching-regulators/739?k=TPS63051RMWR&k=&pkeyword=TPS63051RMWR&pv7=2&sf=0&quantity=&ColumnSort=0&page=1&pageSize=25, Manufacturer Part Number=TPS63051RMWR
U3: "BLUETOOTH 5.0 MODULE", Digi-Key Part Number=336-5146-1-ND, Manufacturer="Silicon Labs", ComponentLink1Description="Digi-Key Link", ComponentLInk1URL=https://www.digikey.com/products/en/rf-if-and-rfid/rf-transceiver-modules/872?k=BGM13P22F512GA-V2&k=&pkeyword=BGM13P22F512GA-V2&pv7=2&sf=0&quantity=&ColumnSort=0&page=1&pageSize=25, Manufacturer Part Number=BGM13P22F512GA-V2
U4: library part FT232RL-REEL, "USB Bridge, USB to UART USB 2.0 UART Interface 28-SSOP", Digi-Key Part Number=768-1007-1-ND, Manufacturer="FTDI, Future Technology Devices International Ltd", ComponentLink1Description="Digi-Key Link", ComponentLInk1URL=https://www.digikey.com/product-detail/en/ftdi-future-technology-devices-international-ltd/FT232RL-REEL/768-1007-1-ND/1836402, Manufacturer Part Number=FT232RL-REEL

## Via types
v1: diameter 24, hole 12, Top Layer to Bottom Layer, tented top, 98 vias
v2: diameter 28, hole 14, Top Layer to Bottom Layer, tented top, 1 vias

## Nets (pads, with @x,y where several pads share a name; then routed paths per layer and width w, separated by ;. In a path a pad name is that pad's centre, name@x,y a point inside that pad or via, vN(x,y) a via of type N, cw(c..) or ccw(c..) an arc to the next point about the centre after c; other vN are vias at no path point)
ADCIN: C8.2 D5.2 R15.1 TP4.1 U3.5 | length 3245.4
  Top Layer w10: R15.1@1340,2830 TP4.1@1655,2830 ; TP4.1@1650,2825 TP4.1@1655,2830 ; D5.2@1660,2734.69 TP4.1@1660,2830 ; U3.5 3280,1724.88 3280,2480 3245,2515 2700,2515 2650,2565 2650,2900 2607.5,2942.5 1982.5,2942.5 1875,2835 TP4.1 ; TP4.1@1655,2830 TP4.1@1660,2830 ; TP4.1@1655,2830 TP4.1 ; TP4.1@1660,2830 TP4.1
DEBUG_GPIO0: D10.2 P6.4 U3.9 | length 769.1
  Top Layer w10: U3.9 3095,1723.98 3095,1840 3229.69,1974.69 D10.2 3229.69,2240 3230,2240.32 P6.4@3230,2435
DEBUG_GPIO1: D11.2 P6.3 U3.10 | length 747.3
  Top Layer w10: U3.10 3050,1726.22 3050,1900 3130,1980 P6.3@3130,2435
GND: B1.2 B2.2 C1.1 C2.1 C3.1 C4.1 C5.1 C6.1 C7.1 C8.1 C9.1 C10.1 C11.2 C12.2 D4.1 D5.1 D8.1 D9.1 D10.1 D11.1 D12.1 D13.1 D14.1 D15.1 D16.1 D17.1 D18.1 D19.1 D20.1 D21.1 D22.1 J1.3 LED_EXT.2 P1.5 P2.2 P3.2 P4.3 P4.5 P5.7 P5.8 R2.1 R3.1 R4.1 R5.1 R7.2 R11.1 R14.1 R18.1 R19.1 R22.1 S2.4 S2.5 S2.6 S2.S1 S2.S2 TP11.1 TP12.1 U1.5 U1.8 U1.17 U2.2 U2.6 U2.9 U3.1 U3.12 U3.20 U3.31 U4.7 U4.18 U4.21 U4.25 U4.26 | length 5842.5
  Top Layer w10: P1.5 v1(325,1955) ; v1(1170,2160) 1172.16,2162.16 1279.87,2162.16 U4.18 ; v1(1215,1960) v1@1215.16,1959.84 ; v1(1330,1200) 1359.84,1170.16 U2.9 ; 1339.84,1959.84 1345,1965 ; 1342.2,2087.8 1345,2085 ; v1(1605.16,1284.84) U2.6 1606.53,1225.28 1606.53,1195.97 1632.34,1170.16 U2.2 ; S2.6 S2.6@1750,2068.43
  Top Layer w12: v1(670,1550) 690,1570 U1.5 ; U1.8 750,1568 v1(773,1545)
  Top Layer w14: v1@1215.16,1959.84 U4.26 ; U4.25 U4.26 ; U4.21 1342.2,2087.8 ; 1339.84,1959.84 U4.26 ; U4.7 1627.8,2062.2
  Top Layer w20: v1(1925,1155) v1@1925.32,1155.32 ; v1(2990,2260) v1@2990.31,2259.68 ; v1(3090,2260) v1@3090.31,2259.68 ; v1(3190,2260) v1@3190.31,2259.68 ; v1(3385,2290) v1@3385.31,2289.68
  Top Layer w30: v1(97.44,1237.44) R11.1 ; P2.2 260,2480 330,2550 v1(330,2620) TP12.1@330,2720 ; B1.2@279.37,320.63 B1.2 280,349.37 v1(280,525) ; v1(540,2038) R2.1 R4.1 ; v1(550,1503) R7.2 ; C1.1 v1(710,2165) ; R3.1 v1(785,1995) ; J1.3 1038.07,2811.93 v1(1040,2810) ; v1(970,2205) 1030,2205 ; C3.1@977.56,1668 R5.1 v1(1050,1743) ; v1(1195,2715) R14.1 ; C4.1 v1(1342.44,1087.44) ; 1345,1965 1370,1990 1370,2060 1345,2085 ; v1(1410,2715) C8.1 ; C5.1 1597.87,1277.56 v1(1605.16,1284.84) ; 1630,2060 1741.57,2060 S2.6 ; D5.1 v1(1749.68,2700.32) 1750,2700 1754.7,2617.83 1755,2612.56 D4.1@1857.13,2612.56 ; C6.1 v1(1880,1275) ; v1(1840,705) 1840.35,704.65 B2.2 ; S2.S2@1914.13,2205 TP11.1 ; S2.S2@1914.72,2200 S2.S2 1905,2209.72 1905,2400 1950,2445 LED_EXT.2@2000,2445 ; v1@1925.32,1155.32 D19.1 ; v1(2080,665) C10.1 ; v1(2080,845) R19.1 ; v1(2080,955) C9.1 ; v1(2090,330) C11.2 ; v1(2180,1340) 2180.32,1340.32 D20.1 ; R18.1 v1(2190,1280) ; P4.5 P4.3 2270,1790 v1(2230,1790) ; v1(2255,2495) 2255.32,2495.32 D17.1 ; v1(2280,1345) 2280,1379.69 D22.1 ; v1(2355,2420) 2355.32,2420.32 D16.1 ; v1(2425,140) TP12.1@2570,140 ; D21.1 2439.68,1424.68 v1(2440,1425) ; v1(2455,2340) 2455.32,2340.32 D15.1 ; v1(2555,2270) 2555,2319.69 D14.1 ; R22.1 v1(2780,305) ; v1(2830,2235) 2855,2210 D13.1 ; v1(2890,1277.56) U3.20 2951.73,1216.73 v1(2950,1215) ; v1(2890,1720) 2892.44,1722.44 U3.12 2951.73,1788.27 v1(2950,1790) ; D12.1 v1@2990.31,2259.68 ; D11.1 v1@3090.31,2259.68 ; D10.1 v1@3190.31,2259.68 ; D9.1 3369.69,2224.37 D8.1 v1@3385.31,2289.68 ; v1(3470,1215) 3471.42,1216.42 U3.31 ; v1(3470,1820) 3471.42,1818.58 U3.1
  other v1: 1125,35 400,40 640,40 880,40 1360,40 1600,40 1840,40 2085,40 2330,40 2570,40 2810,40 45,100 2845,135 45,345 2885,485 3125,485 3365,485 45,585 3470,725 45,825 3470,970 45,1070 3070,1395 3180,1395 3290,1395 3070,1470 3180,1470 3290,1470 3070,1545 3180,1545 3290,1545 3070,1620 3180,1620 3290,1620 2830,1995 3470,2065 3470,2305 45,2370 2830,2475 45,2615 2830,2720 45,2860 1215,2960 1700,2960 240,2965 485,2965 1460,2965 1945,2965
  other v2: 720,1655
I2C_SCL: D13.2 P6.1 U3.13 | length 899.7
  Top Layer w10: P6.1@2930,2435 2930,1900 2840,1810 2840,1705 2895,1650 2937.95,1650 U3.13
I2C_SDA: D12.2 P6.2 U3.11 | length 725.4
  Top Layer w10: U3.11 2998.98,1948.98 3030,1980 P6.2@3030,2435
LED0: LED0.2 U3.25 | length 654.4
  Top Layer w10: LED0.2 2948.78,816.22 3106.22,816.22 3187.95,897.95 U3.25
LED1: LED1.2 U3.26 | length 893
  Top Layer w10: LED1.2 2837.56,787.44 2855,770 3155,770 3235,850 3235,1277.36 U3.26
LEUART_RX: D9.2 P6.5 U3.3 | length 732
  Top Layer w10: P6.5@3330,2435 3330,1920 3376.93,1873.07 U3.3
LEUART_TX: D8.2 P6.6 U3.2 | length 712.6
  Top Layer w10: U3.2 P6.6@3424.17,2435
NetC5_2: C5.2 U2.7 | length 83.7
  Top Layer w8: C5.2 1555.43,1222.44 U2.7
NetC7_2: C7.2 D4.2 P3.1 R13.2 S2.3 | length 771.6
  Top Layer w12: S2.3 1845,2195 1740,2300 P3.1 1740,2552.44 C7.2 1852.13,2562.44 1860,2570.31 1867.87,2562.44 R13.2
NetD1_2: LED_CHG.2 R8.2 | length 166.2
  Top Layer w10: R8.2 865,1375 885,1355 LED_CHG.2
NetD2_2: LED_PG.2 R9.2 | length 319.8
  Top Layer w10: R9.2 785,1320 850,1255 LED_PG.2@962.44,1255
NetD3_1: LED_EXT.1 R13.1 | length 237.2
  Top Layer w12: R13.1 2017.44,2617.56 2058.9,2576.1 LED_EXT.1@2058.9,2445
NetD6_1: LED0.1 R20.1 | length 80.9
  Top Layer w10: LED0.1 2895,817.56 R20.1
NetD7_1: LED1.1 R21.1 | length 83.5
  Top Layer w10: LED1.1 2785,817.56 2785,889.88 R21.1
NetD23_1: LED_RX.1 R23.1 | length 180.2
  Top Layer w10: LED_RX.1 1172.44,1735 1232.56,1735 R23.1
NetD23_2: LED_RX.2 U4.22 | length 343.3
  Top Layer w10: LED_RX.2 1087.56,1875 1087.56,1985 1164.76,2062.2 U4.22 U4.22@1280.08,2060
NetD24_1: LED_TX.1 R24.1 | length 210.2
  Top Layer w10: LED_TX.1 1255.12,1817.44 R24.1
NetD24_2: LED_TX.2 U4.23 | length 246
  Top Layer w10: LED_TX.2 1165,1975 1226.61,2036.61 U4.23 U4.23@1281.76,2037.14
NetJ1_1: J1.1 R14.2 R15.2 | length 809.1
  Top Layer w10: J1.1 641.3,2783.7 700,2725 1055,2725 1162.56,2832.56 R14.2 1197.56,2830 R15.2
NetL1_1: L1.1 U2.3 | length 113.5
  Top Layer w10: U2.3 1661.97,1189.53 L1.1@1775,1189.53
NetL1_2: L1.2 U2.1 | length 113.3
  Top Layer w10: U2.1 L1.2@1775,1150.47
NetP4_10: P4.10 R26.1 | length 186.5
  Top Layer w10: R26.1@2068.15,1345 2120,1396.85 P4.10
NetP5_1: P5.1 P5.2 R27.1 | length 926.9
  Top Layer w12: P5.1 P5.2 R27.1 R27.1@2195,2038.15
NetP7_1: P7.1 U3.18 | length 690.7
  Top Layer w10: P7.1 2550,1525 2669.49,1405.51 U3.18
NetP8_1: P8.1 U3.19 | length 562.5
  Top Layer w10: P8.1 2490,1470 2601.73,1358.27 U3.19
NetR2_2: R2.2 U1.1 | length 251
  Top Layer w10: R2.2 540,1807 U1.1
NetR3_2: R3.2 U1.14 | length 195.2
  Top Layer w12: U1.14 730,1763 785,1818 R3.2
NetR4_2: R4.2 U1.16 | length 184.9
  Top Layer w10: R4.2 690,1855.44 U1.16
NetR5_2: R5.2 U1.12 | length 168.5
  Top Layer w10: U1.12 836,1743 R5.2
NetR6_2: R6.2 U1.6 | length 120
  Top Layer w10: R6.2 710,1480.44 U1.6
NetR7_1: R7.1 U1.4 | length 113.8
  Top Layer w10: R7.1 554.44,1625 U1.4
NetR8_1: R8.1 U1.9 | length 170.5
  Top Layer w10: U1.9 778,1592.33 865,1505.33 R8.1
NetR9_1: R9.1 U1.7 | length 135.8
  Top Layer w10: U1.7 729,1596 729,1536.67 775.12,1490.56 R9.1
NetR10_2: R10.2 S1.1 | length 348
  Top Layer w10: S1.1 184.61,1580 290,1580 327.44,1542.56 R10.2
  Top Layer w12: S1.1 S1.1@182.76,1585
NetR11_2: R11.2 S1.3 | length 94.5
  Top Layer w10: R11.2 181.18,1293.74 S1.3
NetR18_2: PB0.2 PB0.4 R18.2 | length 389.5
  Top Layer w10: R18.2@2192.56,1175 2193.98,1173.58 PB0.4 PB0.2
NetR19_2: PB1.2 PB1.4 R19.2 | length 389.5
  Top Layer w10: R19.2 2193.98,843.58 PB1.4 PB1.2
NetR22_2: R22.2 RESET.2 RESET.4 | length 404.5
  Top Layer w10: RESET.2 RESET.4 2671.02,306.42 R22.2
PB0: C9.2 PB0.1 PB0.3 R16.1 U3.27 | length 2016.7
  Top Layer w10: R16.1 2165,1060 2195,1030 2195,957.44 C9.2 2227.09,955 PB0.3 PB0.1 2670,907.91 2670,775 2725,720 3200,720 3285,805 3285,1275 U3.27
PB1: C10.2 PB1.1 PB1.3 R17.1 U3.28 | length 1896.9
  Top Layer w10: R17.1 2160,760 2192.56,727.44 C10.2@2192.56,667.83 ; C10.2 C10.2@2192.56,667.83 ; U3.28 3329.69,739.68 3256.42,666.42 PB1.1 PB1.3 2193.98,666.42 C10.2@2192.56,667.83
RESETN: C11.1 D19.2 R12.1 R26.2 RESET.1 RESET.3 U2.8 U3.30 | length 4800.1
  Top Layer w10: U2.8 1425.16,1189.84 1395,1220 1395,1320 1450,1375 1525,1375 1575,1425 1575,1690 1695,1810 1930,1810 1966.85,1773.15 R26.2 R26.2@1956.85,1340 ; R12.1 R26.2@1956.85,1340 ; C11.1@2085,485 2267.09,485 RESET.1 RESET.3 2632.91,535 3340,535 3420,615 3420,1273.39 U3.30 ; C11.1 2022.44,487.56 1965,545 1965,1331.85 R26.2@1956.85,1340
SPI_CLK: D16.2 P5.4 U3.16 | length 1693.6
  Top Layer w10: P5.4 2395,2190 2660,1925 2660,1615 2770,1505 2941.22,1505 U3.16
SPI_CSN: D17.2 P5.3 U3.17 | length 1810.3
  Top Layer w10: P5.3 2295,2190 2600,1885 2600,1580 2727.24,1452.76 U3.17
SPI_MISO: D15.2 P5.5 U3.15 | length 1583
  Top Layer w10: P5.5 2495,2180 2720,1955 2720,1650 2830,1540 2938.98,1540 U3.15
SPI_MOSI: D14.2 P5.6 U3.14 | length 1467
  Top Layer w10: P5.6 2595,2185 2780,2000 2780,1680 2870,1590 2941.73,1590 U3.14
SWCLK: D21.2 P4.4 U3.21 | length 1299.9
  Top Layer w10: P4.4 2270,1565 2295,1590 2380,1590 2400,1570 2400,1385.31 D21.2 2400.31,1355.31 2400,1355 2430,1325 2705,1325 2760,1270 2760,1155 2780,1135 2965,1135 3000,1170 3000,1276.54 U3.21
SWDIO: D22.2 P4.2 U3.22 | length 1250.3
  Top Layer w10: P4.2 2320,1380.32 D22.2 2319.69,1335.31 2365,1290 2650,1290 2710,1230 2710,1125 2765,1070 2995,1070 3045,1120 3045,1276.34 U3.22
SWO: D20.2 P4.6 U3.23 | length 1507
  Top Layer w10: P4.6 2220,1380.32 D20.2 2219.69,1325.31 2285,1260 2625,1260 2655,1230 2655,1090 2740,1005 3025,1005 3095,1075 3095,1276.02 U3.23
SYSOFF: S1.2 U1.15 | length 1442.8
  Top Layer w10: S1.2 145,1485 120,1510 120,1610 170,1660 335,1660 450,1775 450,2045 495,2090 575,2090 645,2020 690,2020 710,2000 U1.15
USB_D+: P1.3 U4.15 | length 1281.4
  Top Layer w10: P1.3 351.18,2006.18 400,2055 400,2165 440,2205 875,2205 955,2285 1120,2285 1165,2240 1280.94,2240 U4.15
USB_D-: P1.2 U4.16 | length 1512.3
  Top Layer w10: P1.2 316.77,2031.77 360,2075 360,2185 415,2240 825,2240 920,2335 1325,2335 1360,2300 1360,2240 1335.75,2215.75 U4.16
USB_UART_RX: P8.2 U4.1 | length 1191.2
  Top Layer w10: U4.1@1569.06,1910 U4.1 1627.16,1908.66 1693.5,1975 2310,1975 2490,1795 P8.2
USB_UART_TX: P7.2 U4.5 | length 1043.6
  Top Layer w10: U4.5@1568.74,2010 U4.5 1567.72,2008.5 2381.5,2008.5 2520,1870 P7.2
V_BATT: B1.1 B2.1 C2.2 R10.1 TP1.1 U1.2 U1.3 | length 2341.3
  Top Layer w10: U1.3 U1.2
  Top Layer w12: 610,1665 U1.2
  Top Layer w30: B2.1 509.65,250.35 510,250 470,210 240,210 200.63,249.37 B1.1 200.63,694.37 TP1.1 200,780 382.56,962.56 R10.1 382.56,1567.56 480,1665 610,1665
V_RAW: P1.1 P2.1 R1.1 | length 924.9
  Top Layer w10: 272.36,2057.36 275,2060
  Top Layer w14: P1.1 272.36,2057.36
  Top Layer w30: P2.1 490,2380 525,2345 525,2289.25 R1.1 399.25,2284.25 315,2200 315,2100 275,2060
V_USB: C1.2 R1.2 U1.13 U4.20 | length 1261.4
  Top Layer w10: U1.13 750,1730 ; 1225,2115 1280.67,2115 U4.20
  Top Layer w12: 750,1730 780,1760
  Top Layer w30: R1.2 520.75,2165 C1.2 610,2162.56 610,2130 685,2055 800,2055 ; 785,1760 850,1825 850,2005 800,2055 ; 1225,2115 1191.47,2115 1189.47,2113 1150.53,2113 1148.53,2115 1115,2115 1055,2055 800,2055
VCC: D18.2 P4.1 R16.2 R17.2 R20.2 R21.2 R27.2 S2.2 U3.29 | length 5090.9
  Top Layer w30: R16.2@2020,1060 2020,630 2065,585 3295,585 3376.93,666.93 U3.29 ; R16.2 2020,1062.44 2020,1230 ; P4.1 2320,1821.85 2201.85,1940 1877.48,1940 S2.2 1892.52,1860 1960,1860 2020,1800 2020,1230 ; R20.2 2892.44,952.56 R21.2 2722.44,952.56 2565,1110 2140,1110 2020,1230
VCC_IO: C12.1 R23.2 R24.2 U4.4 U4.17 | length 1122.5
  Top Layer w12: 1229.84,2190.16 U4.17
  Top Layer w14: U4.17 1340,2190.16 1370,2160.16 1370,2160 ; 1439.84,2090.16 1440,2090.16 ; 1440,2040 1440.87,2040 ; 1495.43,1985.43 U4.4
  Top Layer w30: C12.1@1112,2207 1213,2207 1229.84,2190.16 ; R23.2 R24.2 1402.44,1677.44 1440,1715 1440,2040 1440,2090.16 ; 1370,2160 1439.84,2090.16 ; 1440.87,2040 1495.43,1985.43
VREG: C3.2 C4.2 LED_CHG.1 LED_PG.1 R6.1 TP2.1 U1.10 U1.11 U2.10 U2.11 U2.12 | length 2055.1
  Top Layer w10: U2.11@1601.65,1128.35 U2.12@1624.84,1128.35
  Top Layer w12: 820,1640 815,1645 U1.10 U1.11 845,1665
  Top Layer w30: R6.1@650,1475.56 R6.1 652.44,1242.56 755,1140 TP2.1 ; 820,1640 1020,1440 1020,1145 TP2.1 ; 845,1665 919.44,1665 C3.2@922.44,1668 ; U2.11@1601.65,1128.35 1588.16,1141.84 1541.89,1141.84 1541.58,1142.16 1027.16,1142.16 TP2.1
VREGOUT: C6.2 R12.2 S2.1 TP3.1 U2.4 U2.5 | length 686.5
  Top Layer w10: U2.5 1641.97,1209.53 U2.4 1684.53,1209.53
  Top Layer w30: 1682.5,1222.5 1735,1275 C6.2 R12.2 1777.44,1367.44 1845,1435 S2.1
pads on no net: J1.2 J1.4 J1.11 J1.None P1.4 P1.6 P1.7 P1.8 P1.9 P4.7 P4.8 P4.9 S1.None U3.4 U3.6 U3.7 U3.8 U3.24 U4.2 U4.3 U4.6 U4.8 U4.9 U4.10 U4.11 U4.12 U4.13 U4.14 U4.19 U4.24 U4.27 U4.28

## Polygon pours and split planes (outlines as drawn)
GND on Bottom Layer "GND" (solid, remove dead copper, shelved, pour order 8): 20,2935 70,2985 2805,2985 2855,2935 2855,2580 2910,2525 3440,2525 3485,2480 3485,1675 3350,1675 3350,1325 3485,1325 3485,520 3435,475 2910,475 2855,420 2855,70 2805,20 70,20 20,70
GND on Top Layer "GND" (solid, remove dead copper, shelved, pour order 10): 20,2935 70,2985 2805,2985 2855,2935 2855,2580 2910,2525 3440,2525 3485,2480 3485,1675 3350,1675 3350,1325 3485,1325 3485,520 3435,475 2910,475 2855,420 2855,70 2805,20 70,20 20,70

## Silkscreen, mask and mechanical layers (free items; w line width, h text height)
Top Overlay:
  drawing of 10 lines, arcs and shapes, not listed
  text "PC9" at 2270,2935 h20 r45
  text "PC8" at 2370,2935 h20 r45
  text "PC7" at 2470,2935 h20 r45
  text "PC6" at 2570,2935 h20 r45
  text "VCC" at 2080,2930 h20 r45
  text "VCC" at 2180,2930 h20 r45
  text "GND" at 2685,2930 h20 r45
  text "GND" at 2785,2930 h20 r45
  text "3V3" at 2090,2795 h20 r270
  text "3V3" at 2185,2795 h20 r270
  text "SPI1_CSN" at 2285,2795 h20 r270
  text "SPI1_CLK" at 2385,2795 h20 r270
  text "SPI1_MISO" at 2485,2795 h20 r270
  text "SPI1_MOSI" at 2585,2795 h20 r270
  text "+" at 1655,2660 h20
  text "+" at 1850,2630 h20
  text "+" at 2215,2530 h20
  text "PB13" at 2915,2525 h20 r45
  text "PB11" at 3020,2525 h20 r45
  text "PA5" at 3120,2525 h20 r45
  text "PA4" at 3220,2525 h20 r45
  text "PD14" at 3320,2525 h20 r45
  text "PD13" at 3415,2525 h20 r45
  text "GND" at 235,2460 h20 r45
  text "+" at 2315,2455 h20
  text "+" at 2085,2435 h20
  text "CURRENT SENSOR" at 655,2415 h20
  text "3V3_IN" at 1810,2415 h20
  text "GND" at 1520,2410 h20
  text "I2C0_SCL" at 2915,2400 h20 r270
  text "I2C0_SDA" at 3015,2400 h20 r270
  text "GPIO1" at 3120,2395 h20 r270
  text "GPIO0" at 3220,2395 h20 r270
  text "UART_RX" at 3320,2395 h20 r270
  text "UART_TX" at 3415,2395 h20 r270
  text "+" at 2415,2380 h20
  text "V_EXT" at 240,2355 h20 r45
  text "+" at 2515,2310 h20
  text "VCC_SELECT" at 1665,2260 h20
  text "+" at 3345,2230 h20
  text "+" at 2855,2175 h20
  text "+" at 2960,2175 h20
  text "+" at 3060,2175 h20
  text "+" at 3155,2175 h20
  text "+" at 3365,2155 h20
  text "EXT_INPUT" at 1950,2125 h20 r270
  text "ECEN 5023 / LOW POWER EMB DESIGN / Gunj Preshit / Aakash Ashish Smitesh" at 2870,1865 h30
  text "+" at 2265,1810 h20
  text "+" at 1100,1770 h20
  text "+" at 1175,1770 h20
  text "DEBUG PORT" at 2010,1760 h20
  text "VREG" at 1950,1715 h20 r270
  text "." at 630,1710 h20
  text "OFF" at 70,1675 h20 r270
  text "BGM13P" at 2795,1610 h35 r270
  text "+" at 2170,1400 h20
  text "+" at 2270,1400 h20
  text "+" at 2465,1375 h20
  text "ON" at 70,1345 h20 r270
  text "+" at 1045,1345 h20
  text "+" at 1045,1250 h20
  text "+" at 1880,1210 h20
  text "ENERGY AUDITOR" at 3090,1055 h60
  text "+" at 2755,840 h20
  text "+" at 2865,840 h20
  text "+" at 565,675 h30
  text "SENSOR" at 3080,665 h60
  text "-" at 1740,660 h30
  text "NODE" at 3120,625 h60
  text "1" at 2200,475 h20
  text "3" at 2650,475 h20
  text "-" at 1740,330 h30
  text "+" at 565,325 h30
  text "2" at 2190,295 h20
  text "4" at 2595,225 h20
  text "COIN CELL 2450" at 1615,155 h20
Outline:
  lines w40: 0,0 0,3005 2875,3005 2875,2600 3505,2600 3505,400 3425,400 2875,400 2875,0 0,0
Drill Drawing:
  circle w10: c-777.6,4038.33 r33.33
  lines w10: -810.93,4171.67 -794.26,4171.67 -777.6,4155 -760.93,4171.67 -744.26,4171.67 -760.93,4188.33 -744.26,4205 -760.93,4205 -777.6,4221.67 -794.26,4205 -810.93,4205 -794.26,4188.33 -810.93,4171.67 ; -810.93,4305 -744.26,4305 -744.26,4371.67 -810.93,4371.67 -810.93,4305 ; -810.93,4521.67 -744.26,4521.67 -777.6,4455 -810.93,4521.67 ; -810.93,4605 -810.93,4621.67 -794.26,4638.33 -810.93,4655 -810.93,4671.67 -794.26,4671.67 -777.6,4655 -760.93,4671.67 -744.26,4671.67 -744.26,4655 -760.93,4638.33 -744.26,4621.67 -744.26,4605 -760.93,4605 -777.6,4621.67 -794.26,4605 -810.93,4605 ; -810.93,4755 -777.6,4771.67 -744.26,4755 -760.93,4788.33 -744.26,4821.67 -777.6,4805 -810.93,4821.67 -794.26,4788.33 -810.93,4755
  lines w15: -870.72,3960 7005.14,3960 ; -870.72,4860 7005.14,4860 ; -319.84,3810 -319.84,5010 ; 270,3810 270,5010 ; 1369.68,3810 1369.68,5010 ; 1875.56,3810 1875.56,5010 ; 2609.36,3810 2609.36,5010 ; 4108.91,3810 4108.91,5010 ; 4698.76,3810 4698.76,5010 ; 5444.55,3810 5444.55,5010 ; 6094.38,3810 6094.38,5010 ; -870.72,3810 7005.14,3810 7005.14,5010 -870.72,5010 -870.72,3810
  text "Symbol" at -780.72,4905 h72
  text "Count" at -274.84,4905 h72
  text "Hole Size" at 315,4905 h72
  text "Plated" at 1414.68,4905 h72
  text "Hole Type" at 1920.56,4905 h72
  text "Drill Layer Pair" at 2654.36,4905 h72
  text "Via/Pad" at 4153.91,4905 h72
  text "Pad Shape" at 4743.76,4905 h72
  text "Template" at 5489.55,4905 h72
  text "Hole Length" at 6139.38,4905 h72
  text "98" at -274.84,4755 h60
  text "12.00mil (0.305mm)" at 315,4755 h60
  text "PTH" at 1414.68,4755 h60
  text "Round" at 1920.56,4755 h60
  text "Top Layer - Bottom Layer" at 2654.36,4755 h60
  text "Via" at 4153.91,4755 h60
  text "Rounded" at 4743.76,4755 h60
  text "v61h30m0" at 5489.55,4755 h60
  text "-" at 6139.38,4755 h60
  text "1" at -274.84,4605 h60
  text "14.00mil (0.356mm)" at 315,4605 h60
  text "PTH" at 1414.68,4605 h60
  text "Round" at 1920.56,4605 h60
  text "Top Layer - Bottom Layer" at 2654.36,4605 h60
  text "Via" at 4153.91,4605 h60
  text "Rounded" at 4743.76,4605 h60
  text "v71h36m0" at 5489.55,4605 h60
  text "-" at 6139.38,4605 h60
  text "2" at -274.84,4455 h60
  text "33.47mil (0.850mm)" at 315,4455 h60
  text "NPTH" at 1414.68,4455 h60
  text "Round" at 1920.56,4455 h60
  text "Top Layer - Bottom Layer" at 2654.36,4455 h60
  text "Pad" at 4153.91,4455 h60
  text "Rounded" at 4743.76,4455 h60
  text "c85hn85" at 5489.55,4455 h60
  text "-" at 6139.38,4455 h60
  text "28" at -274.84,4305 h60
  text "35.43mil (0.900mm)" at 315,4305 h60
  text "PTH" at 1414.68,4305 h60
  text "Round" at 1920.56,4305 h60
  text "Top Layer - Bottom Layer" at 2654.36,4305 h60
  text "Pad" at 4153.91,4305 h60
  text "(Mixed)" at 4743.76,4305 h60
  text "(Mixed)" at 5489.55,4305 h60
  text "-" at 6139.38,4305 h60
  text "2" at -274.84,4155 h60
  text "55.12mil (1.400mm)" at 315,4155 h60
  text "NPTH" at 1414.68,4155 h60
  text "Round" at 1920.56,4155 h60
  text "Top Layer - Bottom Layer" at 2654.36,4155 h60
  text "Pad" at 4153.91,4155 h60
  text "Rounded" at 4743.76,4155 h60
  text "c140hn140" at 5489.55,4155 h60
  text "-" at 6139.38,4155 h60
  text "2" at -274.84,4005 h60
  text "55.12mil (1.400mm)" at 315,4005 h60
  text "PTH" at 1414.68,4005 h60
  text "Round" at 1920.56,4005 h60
  text "Top Layer - Bottom Layer" at 2654.36,4005 h60
  text "Pad" at 4153.91,4005 h60
  text "Rounded" at 4743.76,4005 h60
  text "c210h140" at 5489.55,4005 h60
  text "-" at 6139.38,4005 h60
  text "133 Total" at -274.84,3855 h60

## Dimensions
0,3005 to 3505,2600 on Drill Drawing
3505.28,1753.94 to 3505,2600 on Drill Drawing
3505,400 to 3505.28,1246.06 on Drill Drawing
0,0 to 0,3005 on Drill Drawing

## Text inside footprints (layer, text, board x,y; h text height)
P4: Top Overlay "10" at 2025,1470 h20; Top Overlay "9" at 2040,1675 h20; Top Overlay "2" at 2385,1470 h20; Top Overlay "1" at 2380,1675 h20
PB0: Mechanical 1 "1" at 2521.19,1035.51 h73.82 r180; Mechanical 1 "4" at 2353.86,1187.07 h73.82 r180; Mechanical 1 "3" at 2347.73,1031.57 h73.82 r180; Mechanical 1 "2" at 2513.2,1189.14 h73.82 r180
PB1: Mechanical 1 "1" at 2521.19,705.51 h73.82 r180; Mechanical 1 "4" at 2353.86,857.07 h73.82 r180; Mechanical 1 "3" at 2347.73,701.57 h73.82 r180; Mechanical 1 "2" at 2513.2,859.14 h73.82 r180
RESET: Mechanical 1 "1" at 2328.81,444.49 h73.82; Mechanical 1 "4" at 2496.14,292.93 h73.82; Mechanical 1 "3" at 2502.27,448.43 h73.82; Mechanical 1 "2" at 2336.8,290.86 h73.82